# Altium PCB TIDA-010967_PCB.PcbDoc (part 2 of 5)
Units mil, origin at the board's own origin, x right, y up, seen from the top; angles counter-clockwise.
Board outline 2322.7 x 960 mil, 2 copper layers (Top Layer, Bottom Layer), stack 44.731 mil thick; 178 components, 80 nets, 496 pads, 399 vias.
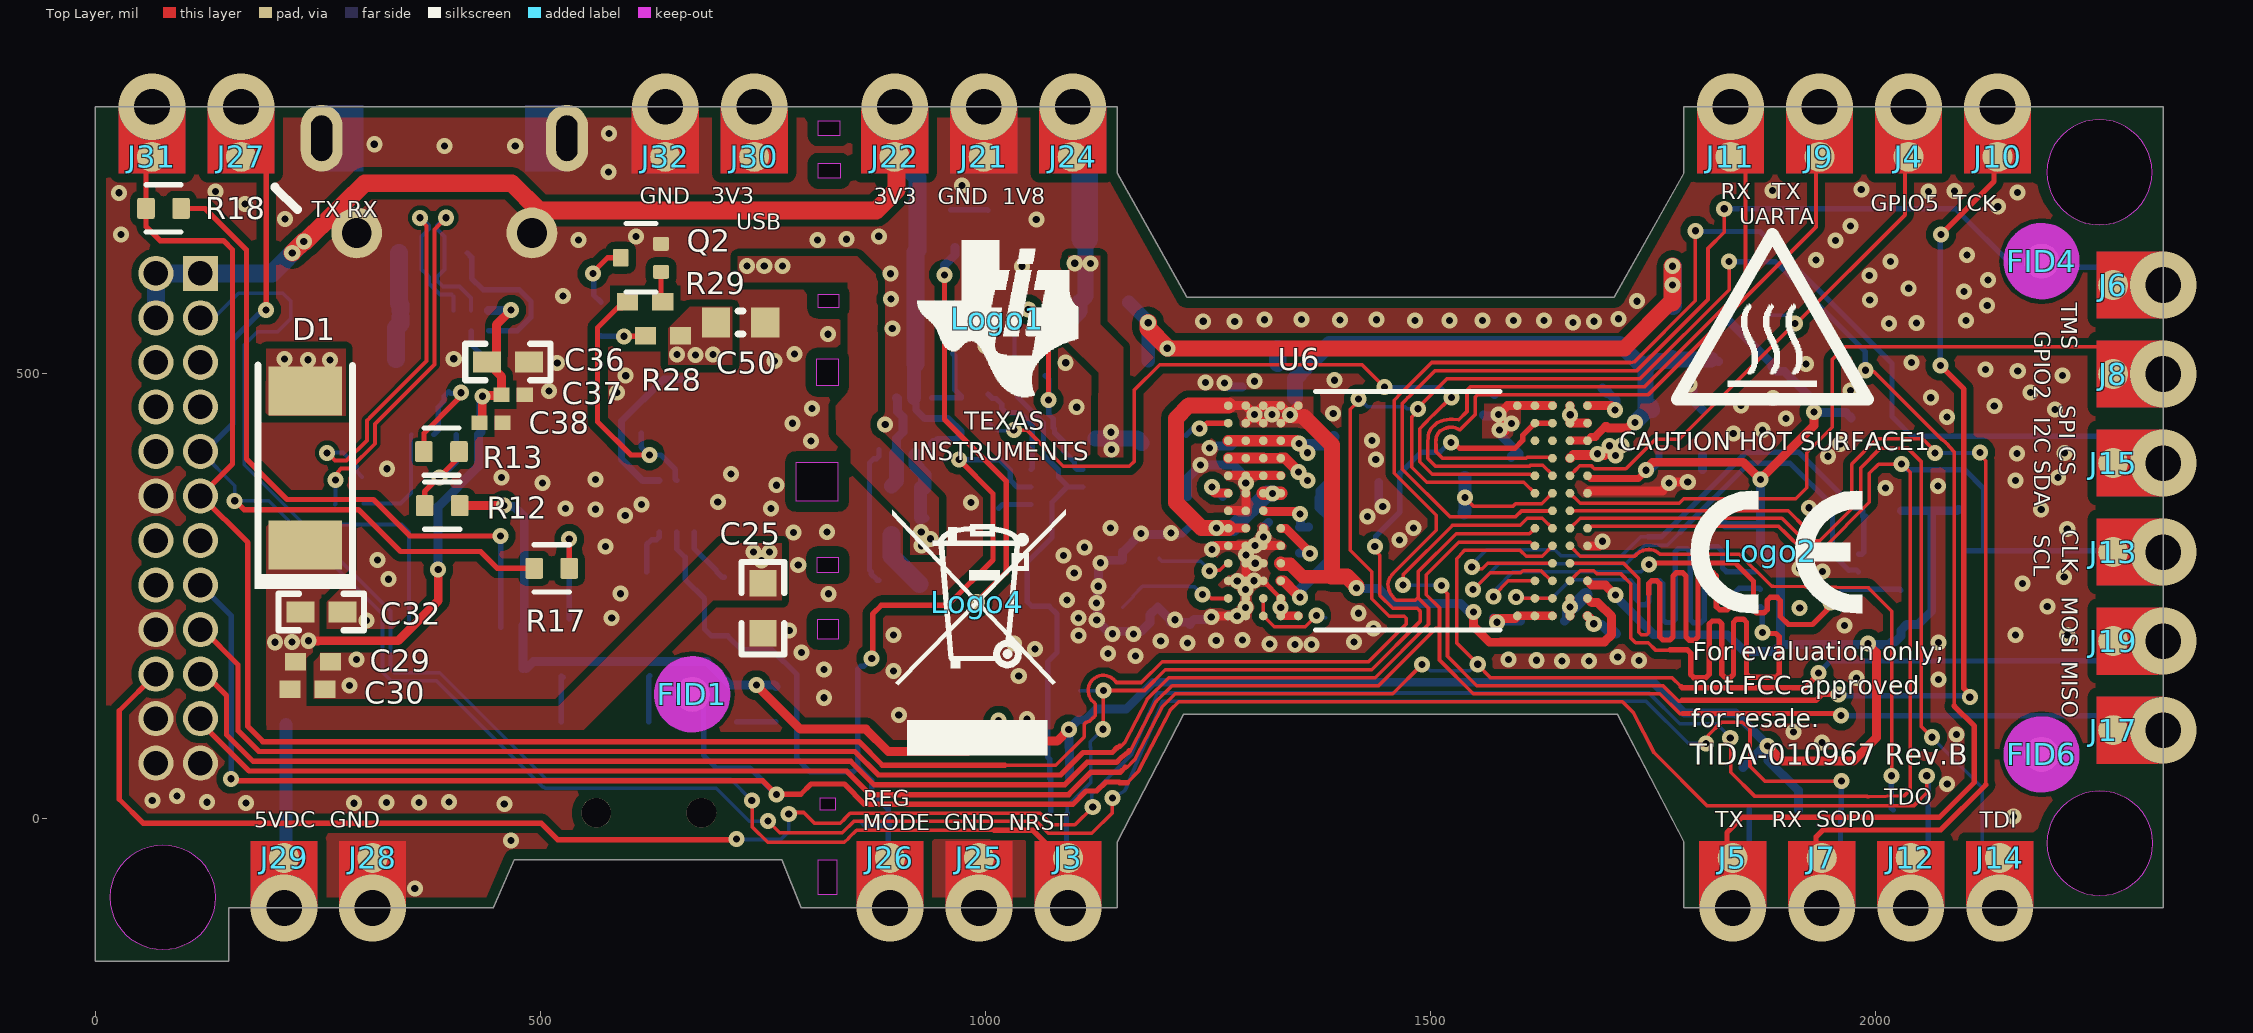
[diagram p0: Top Layer view]

## Part data (continued)
C33: library part CMP-0008944-2, "CAP, CERM, 47 uF, 10 V, +/- 10%, X5R, 1206", Cap_Case=1206, Manufacturer=MuRata, Supplier Part Number 1=81-GRM31CR61A476KE5L, TempCo=X5R, Tolerance_%=10%, Value1=Unknown, Value2=10V, ValueDisplayed=47uF, AEC Category=Q200, AEC Qualified=?, Cap_F=47¦ÌF, ComponentLink1Description="Datasheet link", ComponentLink1URL=http://search.murata.co.jp/Ceramy/PnsearchViewAction.do?HnOFG=ON&HnNFG=ON&SEL_CNT=50&sLang=en&sKey=GRM31CR61A476KE15L&x=9&y=9&search=startwith, CompType=Capacitor, LatestRevisionDate=2017-03-09, MountType=SMT, PackageReference=1206, PartNumber=GRM31CR61A476KE15L, Polarized=N, Published=2008-06-19, Publisher="Texas Instruments", RoHS=Y, SizeArea_mm2=5.12, SizeAreaWB_mm2=10.92, SizeX_mm=3.2, SizeY_mm=1.6, SizeZ_mm=1.8, Supplier 1=Mouser, TaMax_C=85¡ãC, TaMin_C=-55¡ãC, Technology=Ceramic, U/M=EA, VDC_V=10V
C34: library part CMP-0064969-1, "CAP, CERM, 0.1 uF, 10 V,+/- 10%, X7S, 0201", Cap_Case=0201, Manufacturer=MuRata, Supplier Part Number 1=490-14450-1-ND, TempCo=X7S, Tolerance_%=10%, Value1=Unknown, Value2=10V, ValueDisplayed=0.1uF, AEC Category=Q200, AEC Grade=N/A, AEC Qualified=N, Cap_F=100nF, ComponentLink1Description="Datasheet link", ComponentLink1URL=http://search.murata.co.jp/Ceramy/image/img/A01X/G101/ENG/GRM033C71A104KE14-01.pdf, CompType=Capacitor, LatestRevisionDate=2017-06-05, MountType=SMT, PackageReference=0201, PartNumber=GRM033C71A104KE14D, Polarized=N, Published=2008-06-19, Publisher="Texas Instruments", RoHS=Y, SizeArea_mm2=0.18, SizeAreaWB_mm2=2.08, SizeX_mm=0.6, SizeY_mm=0.3, SizeZ_mm=0.26, Supplier 1=Digi-Key, Supplier 2=Mouser, Supplier Part Number 2=81-GRM033C71A104KE4D, TaMax_C=125¡ãC, TaMin_C=-55¡ãC, Technology=Ceramic, U/M=EA, VDC_V=10V
C36: library part CMP-0078623-1, "CAP, CERM, 10 ¦ÌF, 10 V,+/- 20%, X5R, 0402", Cap_Case=0402_080, Manufacturer=AVX, Supplier Part Number 1=478-10052-1-ND, TempCo=X5R, Tolerance_%=20%, Value2=10V, ValueDisplayed=10¦ÌF, AEC Category=Q200, AEC Grade=N/A, AEC Qualified=N, Cap_F=10¦ÌF, ComponentLink1Description="Datasheet link", ComponentLink1URL=http://datasheets.avx.com/cx5r.pdf, CompType=Capacitor, MountType=SMT, PackageReference=0402, PartNumber=0402ZD106MAT2A, Polarized=N, RoHS=Y, SizeArea_mm2=0.5, SizeAreaWB_mm2=3, SizeX_mm=1, SizeY_mm=0.5, SizeZ_mm=0.8, Supplier 1=Digi-Key, Supplier 2=Mouser, Supplier Part Number 2=581-0402ZD106MAT2A, TaMax_C=85¡ãC, TaMin_C=-55¡ãC, Technology=Ceramic, U/M=EA, VDC_V=10V
C37 C39 C40: library part CMP-0009717-2, "CAP, CERM, 0.1 uF, 16 V, +/- 10%, X5R, 0201", Cap_Case=0201, Manufacturer=MuRata, Supplier Part Number 1=490-9985-1-ND, TempCo=X5R, Tolerance_%=10%, Value1=Unknown, Value2=16V, ValueDisplayed=0.1uF, AEC Category=Q200, AEC Grade=N/A, AEC Qualified=N, Cap_F=100nF, ComponentLink1Description="Datasheet link", ComponentLink1URL=http://psearch.en.murata.com/capacitor/product/GRM033R61C104KE84%23.pdf, CompType=Capacitor, LatestRevisionDate=2017-03-09, MountType=SMT, PackageReference=0201, PartNumber=GRM033R61C104KE84D, Polarized=N, Published=2008-06-19, Publisher="Texas Instruments", RoHS=Y, SizeArea_mm2=0.18, SizeAreaWB_mm2=2.08, SizeX_mm=0.6, SizeY_mm=0.3, SizeZ_mm=0.33, Supplier 1=Digi-Key, Supplier 2=Mouser, Supplier Part Number 2=81-GRM33R61C104KE84D, TaMax_C=85¡ãC, TaMin_C=-55¡ãC, Technology=Ceramic, U/M=EA, VDC_V=16V
C38: library part CMP-0009720-2, "CAP, CERM, 0.01 uF, 6.3 V, +/- 10%, X7R, 0201", Cap_Case=0201, Manufacturer=MuRata, Supplier Part Number 1=490-1262-1-ND, TempCo=X7R, Tolerance_%=10%, Value1=Unknown, Value2=6.3V, ValueDisplayed=0.01uF, AEC Category=Q200, AEC Qualified=?, Cap_F=10nF, ComponentLink1Description="Datasheet link", ComponentLink1URL=http://search.murata.co.jp/Ceramy/PnsearchViewAction.do?HnOFG=ON&HnNFG=ON&SEL_CNT=50&sLang=en&sKey=GRM033R70J103KA01D&x=9&y=9&search=startwith, CompType=Capacitor, LatestRevisionDate=2017-03-09, MountType=SMT, PackageReference=0201, PartNumber=GRM033R70J103KA01D, Polarized=N, Published=2008-06-19, Publisher="Texas Instruments", RoHS=Y, SizeArea_mm2=0.18, SizeAreaWB_mm2=2.08, SizeX_mm=0.6, SizeY_mm=0.3, SizeZ_mm=0.26, Supplier 1=Digi-Key, Supplier 2=Mouser, Supplier Part Number 2=81-GRM033R70J103KA1D, TaMax_C=125¡ãC, TaMin_C=-55¡ãC, Technology=Ceramic, U/M=EA, VDC_V=6.3V
C41 C42: library part CMP-0124498-1, "Ceramic Capacitor for Automotive 22pF  ¡À5% 25VDC C0G 0201 Paper T/R", Manufacturer=Murata, Operating Temperature Range="-55¡ãC to +125¡ãC", TempCo=30ppm/¡ãC, Temperature Characteristic=C0G, Tolerance_%=0.05%, ValueDisplayed=22pF, AEC Grade="Grade 1", AEC Qualified=Yes, Cap_F=22pF, ComponentLink1Description=Datasheet, ComponentLink1URL=https://www.murata.com/en-us/products/productdetail?partno=GCM0335C1E220JA16%23, datasheet=https://www.murata.com/en-us/products/productdetail?partno=GCM0335C1E220JA16%23, Datasheet Path=datasheets/Cap-GCM0335C1E220JA16D.pdf, helpURL=https://upverter.com/upn/revision/7c4daa696f5ee5c6/, Lead Free=Yes, PackageReference=0201, Part Number=GCM0335C1E220JA16D, PartNumber=GCM0335C1E220JA16D, RoHS=TRUE, SizeZ_mm=0.33mm, VDC_V=25V
C43: library part CMP-0064946-2, "CAP, CERM, 0.1 uF, 50 V,+/- 10%, X7R, 0402", Cap_Case=0402, Manufacturer=TDK, Supplier Part Number 1=445-173610-1-ND, TempCo=X7R, Tolerance_%=10%, Value1=Unknown, Value2=50V, ValueDisplayed=0.1uF, AEC Category=Q200, AEC Grade=N/A, AEC Qualified=N, Cap_F=100nF, ComponentLink1Description="Datasheet link", ComponentLink1URL=https://product.tdk.com/info/en/catalog/datasheets/mlcc_commercial_soft_en.pdf, CompType=Capacitor, LatestRevisionDate=2017-06-05, MountType=SMT, PackageReference=0402, PartNumber=C1005X7R1H104K050BE, Polarized=N, Published=2008-06-19, Publisher="Texas Instruments", RoHS=Y, SizeArea_mm2=0.5, SizeAreaWB_mm2=3, SizeX_mm=1, SizeY_mm=0.5, SizeZ_mm=0.6, Supplier 1=Digi-Key, Supplier 2=Newark, Supplier 3=Mouser, Supplier Part Number 2=92Y5763, Supplier Part Number 3=810-C1005X7R1H104KBE, TaMax_C=125¡ãC, TaMin_C=-55¡ãC, Technology=Ceramic, U/M=EA, VDC_V=50V
C45 C69 C74: library part CMP-0006470-2, "CAP, CERM, 470 pF, 50 V, +/- 5%, C0G/NP0, 0402", Cap_Case=0402, Manufacturer=MuRata, Supplier Part Number 1=490-1297-1-ND, TempCo=C0G/NP0, Tolerance_%=5%, Value1=Unknown, Value2=50V, ValueDisplayed=470pF, AEC Category=Q200, AEC Qualified=?, Cap_F=470pF, ComponentLink1Description="Datasheet link", ComponentLink1URL=http://search.murata.co.jp/Ceramy/PnsearchViewAction.do?HnOFG=ON&HnNFG=ON&SEL_CNT=50&sLang=en&sKey=GRM1555C1H471JA01D&x=9&y=9&search=startwith, CompType=Capacitor, LatestRevisionDate=2017-03-09, MountType=SMT, PackageReference=0402, PartNumber=GRM1555C1H471JA01D, Polarized=N, Published=2008-06-19, Publisher="Texas Instruments", RoHS=Y, SizeArea_mm2=0.5, SizeAreaWB_mm2=3, SizeX_mm=1, SizeY_mm=0.5, SizeZ_mm=0.6, Supplier 1=Digi-Key, Supplier 2=Mouser, Supplier 3=Farnell, Supplier Part Number 2=81-GRM1555C1H471JA01, Supplier Part Number 3=8819688, TaMax_C=125¡ãC, TaMin_C=-55¡ãC, Technology=Ceramic, U/M=EA, VDC_V=50V
C46 C47: library part CMP-0006367-2, "CAP, CERM, 4.7 pF, 50 V, +/- 2%, C0G/NP0, 0402", Cap_Case=0402, Manufacturer=MuRata, Supplier Part Number 1=490-8102-1-ND, TempCo=C0G/NP0, Tolerance_%=2%, Value1=Unknown, Value2=50V, ValueDisplayed=4.7pF, AEC Category=Q200, AEC Grade=N/A, AEC Qualified=N, Cap_F=4.7pF, ComponentLink1Description="Datasheet link", ComponentLink1URL=http://psearch.murata.com/capacitor/product/GJM1555C1H4R7BB01%23.pdf, CompType=Capacitor, LatestRevisionDate=2017-03-09, MountType=SMT, PackageReference=0402, PartNumber=GJM1555C1H4R7BB01D, Polarized=N, Published=2008-06-19, Publisher="Texas Instruments", RoHS=Y, SizeArea_mm2=0.5, SizeAreaWB_mm2=3, SizeX_mm=1, SizeY_mm=0.5, SizeZ_mm=0.6, Supplier 1=Digi-Key, Supplier 2=Mouser, Supplier Part Number 2=81-GJM1555C1H4R7BB01, TaMax_C=125¡ãC, TaMin_C=-55¡ãC, Technology=Ceramic, U/M=EA, VDC_V=50V
C48: library part CMP-0860563-1, "CAP, CERM, 0.22 ¦ÌF, 16 V,+/- 10%, X7R, 0402", Cap_Case=0402, Manufacturer="Samsung Electro-Mechanics", TempCo=X7R, Tolerance_%=10%, Value2=16V, ValueDisplayed=0.22¦ÌF, AEC Category=Q200, AEC Grade=N/A, AEC Qualified=N, Cap_F=220nF, ComponentLink1Description="Datasheet link", ComponentLink1URL=http://www.samsungsem.com/kr/support/product-search/mlcc/__icsFiles/afieldfile/2019/06/18/CL05B224KO5NNNC-19.pdf, CompType=Capacitor, Green_EU RoHS=Passed, Green_EU RoHS-2=Passed, Green_Lifecycle=Active, Green_REACh=Incomplete, MountType=SMT, PackageReference=0402, PartNumber=CL05B224KO5NNNC, Polarized=N, RoHS=Y, SizeArea_mm2=0.5, SizeAreaWB_mm2=3, SizeX_mm=1, SizeY_mm=0.5, SizeZ_mm=0.6, TaMax_C=125¡ãC, TaMin_C=-55¡ãC, Technology=Ceramic, U/M=EA, VDC_V=16V
"CAUTION HOT SURFACE1": library part CMP-0074837-2, "IEC 61010-1 Hot Surface Warning", Manufacturer="Texas Instruments", AEC Category=Q200, ComponentLink1Description="Datasheet Link", ComponentLink1URL=http://www.ti.com/lit/ds/symlink/GPN.pdf, ComponentLink2Description="Product Folder", ComponentLink2URL=http://www.ti.com/product/GPN, ComponentLink3Description="Online Datasheet", ComponentLink3URL=http://www.ti.com/product/GPN/datasheet, CompType=IC, LatestRevisionDate=2017-07-06, Lib Reference=IEC_HotSurface, PartNumber="CAUTION HOT SURFACE", Published=2009-03-03, Publisher="Texas Instruments", SymbolCreator=a0412235, SymbolVersion=2011-08-22
D1: library part CMP-0078758-2, "Diode, Schottky, 30 V, 2 A, AEC-Q101, SOD-128", Manufacturer=Nexperia, Value1=2A, Value2=0.36V, AEC Category=Q101, AEC Qualified=Y, ComponentLink1Description="Datasheet link", ComponentLink1URL=https://assets.nexperia.com/documents/data-sheet/PMEG3020EP.pdf, CompType=Diode, Io_A=2A, MountType=SMT, PackageReference=SOD-128, PartNumber=PMEG3020EP,115, RoHS=Y, SizeArea_mm2=11.5, SizeAreaWB_mm2=19.6, SizeX_mm=4.6, SizeY_mm=2.5, SizeZ_mm=1.1, TJmax_C=150¡ãC, TYPE=Schottky, Vf_V=3.6dV, Vr_V=30V
D2 D3: library part CMP-0090807-1, "LED Uni-Color Yellow 588nm 2-Pin Chip 0402(1006Metric) T/R", Color=Yellow, Digikey Part Number=VLMY1500-GS08CT-ND, Forward Current=20mA, Manufacturer=Vishay, Mouser Part Number=78-VLMY1500-GS08, Operating Temperature Range="-30¡ãC to +85 ¡ãC", Power_TotalModule=75mW, AEC Qualified=No, Angle=130¡ã, ComponentLink1Description=Datasheet, ComponentLink1URL=https://www.vishay.com/docs/82554/vlmo1500.pdf, datasheet=https://www.vishay.com/docs/82554/vlmo1500.pdf, Datasheet Path=datasheets/Diode-VLMY1500-GS08.pdf, Digikey Description="LED YELLOW 0402 SMD", helpURL=https://upverter.com/upn/revision/6fc1d97824805f25/, LambdaD=590nm, LambdaP=588nm, Lead Free=Yes, Led Orientation="Top View", Luminous Intensity=90mcd, Mounting Type="Surface Mount", Mouser Description="VLMY1500-GS08 Yellow LED, 597 nm 1005 (0402), Square Lens SMD package", PackageReference=0402, Part Number=VLMY1500-GS08, PartNumber=VLMY1500-GS08, RoHS=TRUE, SizeZ_mm=0.35mm, TaMax_C=+85¡ãC, TaMin_C=-30¡ãC, Vf_V=2V, Vr_V=5V
FID1 FID2 FID3 FID4 FID5 FID6: library part CMP-0077181-1, "Fiducial mark.  There is nothing to buy or mount.", Manufacturer=N/A, ClassName=FiducialMark, CompType=Fiducial, MountType=N/A, PackageReference=N/A, PartNumber=N/A
J1: library part CMP-0054595-1, "Header, 1.27mm, 12x2, Gold, TH", Current_A=1A, Manufacturer="Sullins Connector Solutions", Supplier Part Number 1=S9015E-12-ND, Cert_UL=Y, ClassName=Header, CNHeader=TRUE, ComponentLink1Description="Datasheet URL", ComponentLink1URL=http://www.sullinscorp.com/catalogs/82_PAGE90-91_.050_MALE_HDR_ST_RA_SMT.pdf, CompType=Header, ContactFinish=Gold, CT=FALSE, Gender=Male, LatestRevisionDate=26/05/2017, MountType=TH, Orientation=Vertical, PackageReference="Header, 1.27mm, 12x2, TH", PartNumber=GRPB122VWVN-RC, PinCount=12, Pitch_mm=1.27, Publisher="Texas Instruments", RoHS=Y, Row_Count=2, RowSpacing_mm=1.27, Supplier 1=Digi-Key
J2: library part CMP-0055293-1, "Connector, Receptacle, Micro-USB Type B, R/A, Bottom Mount SMT", Manufacturer=Molex, Supplier Part Number 1=WM1399CT-ND, CNHeader=FALSE, ComponentLink1Description="Datasheet URL", ComponentLink1URL=http://www.molex.com/pdm_docs/sd/1050170001_sd.pdf, CompType=USB, CT=TRUE, Gender=Female, Green_EU RoHS=Passed, Green_EU RoHS-2=Passed, Green_Lifecycle=Active, Green_REACh=Passed, LatestRevisionDate=26/05/2017, MountType=SMT, PackageReference="Micro USB receptacle", PartNumber=105017-0001, Publisher="Texas Instruments", RoHS=Y, Supplier 1=Digi-Key, Supplier 2=Newark, Supplier 3=Mouser, Supplier Part Number 2=78R1699, Supplier Part Number 3=538-105017-0001
J3 J4 J5 J6 J7 J8 J9 J10 J11 J12 J13 J14 J15 J17 J19 J21 J22 J24 J25 J26 J27 J28 J29 J30 J31 J32: library part CMP-0124126-3, Manufacturer=Altium, Operating Temperature Range=to, Conn Gender=NA, Datasheet Path="datasheets/Conn-Castellation 2.54mm.pdf", helpURL=https://upverter.com/upn/revision/e505193ec818b83a/, PackageReference=CASTELLED_TERM, Part Number="Castellation 2.54mm", PartNumber="Castellation 2.54mm", PinCount=1, RoHS=UNKNOWN
L1: library part CMP-0078934-1, "Inductor, Ferrite Bead, Ferrite, 2.2 A, 0.035 ohm, AEC-Q200 Grade 1, SMD", Manufacturer=MuRata, Supplier Part Number 1=490-16506-1-ND, Value1="0.035 ohm", Value2=2.2A, AEC Category=Q200, AEC Grade=1, AEC Qualified=Y, ComponentLink1Description="Datasheet link", ComponentLink1URL=https://www.murata.com/en-us/products/productdata/8796748677150/QNFA9118.pdf, CompType=Inductor, DCR_ohm=0.035, Imax_A=2.2A, LatestRevisionDate=2017-12-07, Material=Ferrite, MountType=SMT, PackageReference=0402, PartNumber=BLM15PD300SZ1D, Published=2008-06-26, Publisher="Texas Instruments", RoHS=Y, SizeArea_mm2=0.5, SizeAreaWB_mm2=3, SizeX_mm=1, SizeY_mm=0.5, SizeZ_mm=0.6, Supplier 1=Digi-Key, Supplier 2=Mouser, Supplier Part Number 2=81-BLM15PD300SZ1D, Technology="Ferrite Bead"
L2 L15: library part CMP-0092096-1, "470nH Shielded Wirewound Inductor 3A 42mOhm Max 0805 (2012 Metric)", Digikey Part Number=490-17727-1-ND, Manufacturer=Murata, Mouser Part Number=81-DFE201210U-R47MP2, Operating Temperature Range="-40¡ãC to +125¡ãC", Part Number=DFE201210U-R47M=P2, Test Frequency=1MHz, Tolerance_%=20%, AEC Qualified=No, ComponentLink1Description=Datasheet, ComponentLink1URL=https://www.murata.com/en-us/products/productdetail?partno=DFE201210U-R47M%23, datasheet=https://www.murata.com/en-us/products/productdetail?partno=DFE201210U-R47M%23, Datasheet Path=datasheets/Ind-DFE201210U-R47M=P2.pdf, DCR_ohm=42m, Digikey Description="FIXED IND .47UH 3.0A 42MOHM", helpURL=https://upverter.com/upn/revision/7b65c208f048e6ea/, Ind_H=470nH, Irms=3A, Isat=4.4A, Lead Free=Yes, Material="Metal Alloy", PackageReference="0805 (2012)", PartNumber=DFE201210U-R47M=P2, RoHS=TRUE, Shrouded=true, SizeZ_mm=1mm, Supplier 1=Digikey, Supplier 2=Mouser, Supplier Part Number 1=490-17727-1-ND, Supplier Part Number 2=81-DFE201210U-R47MP2, Technology=Wirewound
L3 L6: library part CMP-0124620-1, "100 nH Shielded Drum Core, Wirewound Inductor 3.65 A 22mOhm Max 0806 (2016 Metric)", Digikey Part Number=3442-SPH201610UR10MTTR-ND, Manufacturer=Sunlord, Operating Temperature Range="-40¡ãC to +125¡ãC", Self Resonant Frequency=583MHz, Test Frequency=1MHz, Tolerance_%=20%, AEC Qualified=No, ComponentLink1Description=Datasheet, ComponentLink1URL=https://www.sunlordinc.com/uploads/files/20240806/en/SPH%C2%A0Series%C2%A0of%C2%A0SMD%C2%A0Power%C2%A0Inductor.pdf, datasheet=https://www.sunlordinc.com/uploads/files/20240806/en/SPH%C2%A0Series%C2%A0of%C2%A0SMD%C2%A0Power%C2%A0Inductor.pdf, Datasheet Date=2024-06-19, Datasheet Path=datasheets/Ind-SPH201610UR10MT.pdf, DCR_ohm=22m, Digikey Description="FIXED IND 100NH 3.65A 22MOHM SMD", helpURL=https://upverter.com/upn/revision/4015f0fc3580b88b/, Ind_H=100nH, Irms=4.25A, Isat=4.8A, Lead Free=Yes, Material=Ferrite, PackageReference=SMT_IND_2MM0_1MM6, Part Number=SPH201610UR10MT, PartNumber=SPH201610UR10MT, RoHS=TRUE, Shrouded=true, SizeZ_mm=1mm, Supplier 1=Digikey, Supplier Part Number 1=3442-SPH201610UR10MTTR-ND, Technology=Wirewound
L4 L7: library part CMP-0077879-2, "Ferrite Bead, 120 ohm @ 100 MHz, 1.9 A, 0603", Manufacturer=MuRata, Supplier Part Number 1=490-13261-1-ND, Value1="0.04 ohm", Value2=1.9A, ValueDisplayed="120 ohm", ComponentLink1Description="Datasheet link", ComponentLink1URL=http://www.murata.com/en-global/products/productdata/8796737273886/QNFA9101.pdf, CompType="Ferrite Bead", DCR_ohm=0.04, Imax_A=1.9A, MountType=SMT, PackageReference=0603, PartNumber=BLM18KG121TH1D, RoHS=Y, SizeArea_mm2=1.28, SizeAreaWB_mm2=4.68, SizeX_mm=1.6, SizeY_mm=0.8, SizeZ_mm=1.0, Supplier 1=Digi-Key, Supplier 2=Mouser, Supplier Part Number 2=81-BLM18KG121TH1D, ZTyp@100MHz_Ohm=120
Logo1: library part CMP-0074838-1, "Texas Instrument Corporate Signature", ClassName=Logo, LatestRevisionDate=2017-07-06, Lib Reference=TI_Logo, PartNumber="Texas Instruments", Published=2009-03-03, Publisher="Texas Instruments", SymbolCreator=a0412235, SymbolVersion=2011-08-22
Logo2: library part CMP-0074844-2, Manufacturer="Texas Instruments", AEC Category=Q200, ComponentLink1Description="Datasheet Link", ComponentLink1URL=http://www.ti.com/lit/ds/symlink/GPN.pdf, ComponentLink2Description="Product Folder", ComponentLink2URL=http://www.ti.com/product/GPN, ComponentLink3Description="Online Datasheet", ComponentLink3URL=http://www.ti.com/product/GPN/datasheet, CompType=IC, LatestRevisionDate=2017-07-06, Lib Reference="CE Mark", PartNumber="CE Mark", Published=2009-03-03, Publisher="Texas Instruments", SymbolCreator=a0412235
Logo4: library part CMP-0074769-1, Lib Reference="WEEE logo", PartNumber="WEEE logo"
Q1 Q2: library part CMP-0091833-1, "N-Channel 20V 250mA (Ta) 500mW (Ta) Surface Mount VESM", Digikey Part Number=SSM3K35AMFVL3FCT-ND, Drain To Source Breakdown Voltage=20V, Input Capacitace At Vds="18pF @ 10V", Manufacturer=Toshiba, Mouser Part Number=757-SSM3K35AMFVL3F, Operating Temperature Range="to +150¡ãC", Power_W=150mW, Pulse Drain Current=600mA, Typ Forward Diode Voltage=0.8V, AEC Qualified=No, ChMode=False, ComponentLink1Description=Datasheet, ComponentLink1URL=https://toshiba.semicon-storage.com/info/docget.jsp?did=55390&prodName=SSM3K35AMFV, datasheet=https://toshiba.semicon-storage.com/info/docget.jsp?did=55390&prodName=SSM3K35AMFV, Datasheet Path=datasheets/Trans-SSM3K35AMFV,L3F.pdf, Digikey Description="MOSFET N-CH 20V 250MA VESM", helpURL=https://upverter.com/upn/revision/e3a5b9c3bcd77515/, IdsMax_A=250mA, Lead Free=Yes, Number of Channels=1, Number Of N Channels=1, PackageReference=SOT-723, Part Number=SSM3K35AMFV,L3F, PartNumber=SSM3K35AMFV,L3F, QgTyp_nC="0.34nC @ 4.5V", Rdson45_ohm=0.75, RoHS=TRUE, SizeZ_mm=0.55mm, Threshold Vgs Max=1V, Threshold Vgs Min=0.35V, TJmax_C=+150¡ãC, Turn Off Delay Time=6.5ns, Turn On Delay Time=2ns, VdsMax_V=1.2V, Vgs_V=10V
R1 R3 R5 R7 R12 R13 R17 R18: library part CMP-0093147-1, "Res Jumper Thick Film 0402 0 Ohm 5% 1/16W Molded SMD Paper T/R", Digikey Part Number=YAG1279CT-ND, Manufacturer=Yageo, Mouser Part Number=603-RC0402JR-070RP, Operating Temperature Range="-55¡ãC to +155¡ãC", Power_W=63mW, AEC Qualified=No, ComponentLink1Description=Datasheet, ComponentLink1URL=https://www.yageo.com/upload/media/product/productsearch/datasheet/rchip/PYu-RC_51_RoHS_P_2.pdf, datasheet=https://www.yageo.com/upload/media/product/productsearch/datasheet/rchip/PYu-RC_51_RoHS_P_2.pdf, Datasheet Path=datasheets/Res-RC0402JR-070RP.pdf, Digikey Description="RES SMD 0 OHM JUMPER 1/16W 0402", helpURL=https://upverter.com/upn/revision/1e1ee5977c47aafb/, Lead Free=Yes, Mouser Description="RC Series 0402 Jumper Thick Film Chip Resistor", PackageReference=0402, Part Number=RC0402JR-070RP, PartNumber=RC0402JR-070RP, Res_ohm=0, RoHS=TRUE, Series=RC_P, SizeZ_mm=0.4mm, Supplier 1=Digikey, Supplier 2=Mouser, Supplier Part Number 1=YAG1279CT-ND, Supplier Part Number 2=603-RC0402JR-070RP, Technology="Thick Film", VDC_V=50V
R2: library part CMP-0026367-2, "RES, 40.2 k, 1%, 0.063 W, AEC-Q200 Grade 0, 0402", Manufacturer=Vishay-Dale, Power_W=63mW, Supplier Part Number 1=541-40.2KLCT-ND, TempCo="100 ppm/C", Tolerance_%=1%, Value2=0.063W, Value_Code=40k2, ValueDisplayed=40.2k, AEC Category=Q200, AEC Grade=0, AEC Qualified=Y, ComponentLink1Description="Datasheet link", ComponentLink1URL=http://www.vishay.com/docs/20035/dcrcwe3.pdf, CompType=Resistor, EIA_Code=E96, MountType=SMT, PackageReference=0402, PartNumber=CRCW040240K2FKED, Res_ohm=40.2k, RoHS=E, SizeArea_mm2=0.5, SizeX_mm=1, SizeY_mm=0.5, SizeZ_mm=0.6, Supplier 1=Digi-Key, Supplier 2=Newark, Supplier 3=Mouser, Supplier Part Number 2=52K7049, Supplier Part Number 3=71-CRCW0402-40.2K-E3, Technology="Thick Film", Value1=1%, VDC_V=50V
R4 R24 R25 R44 R49 R73 R74 R75: library part CMP-0026245-2, "RES, 2.00 M, 1%, 0.063 W, AEC-Q200 Grade 0, 0402", Manufacturer=Vishay-Dale, Power_W=63mW, Supplier Part Number 1=541-2.00MLCT-ND, TempCo="100 ppm/C", Tolerance_%=1%, Value2=0.063W, Value_Code=2M00, ValueDisplayed=2.00M, AEC Category=Q200, AEC Grade=0, AEC Qualified=Y, ComponentLink1Description="Datasheet link", ComponentLink1URL=http://www.vishay.com/docs/20035/dcrcwe3.pdf, CompType=Resistor, EIA_Code=E96, MountType=SMT, PackageReference=0402, PartNumber=CRCW04022M00FKED, Res_ohm=2M, RoHS=E, SizeArea_mm2=0.5, SizeX_mm=1, SizeY_mm=0.5, SizeZ_mm=0.6, Supplier 1=Digi-Key, Supplier 2=Newark, Supplier 3=Mouser, Supplier Part Number 2=52K6816, Supplier Part Number 3=71-CRCW0402-2M-E3, Technology="Thick Film", Value1=1%, VDC_V=50V
R6 R11: library part CMP-0089143-1, "0 Ohms Jumper 0.1W, 1/10W Chip Resistor 0603 (1608 Metric) Automotive AEC-Q200 Thick Film", Digikey Part Number=P0.0GCT-ND, Manufacturer=Panasonic, Mouser Part Number=667-ERJ-3GEY0R00V, Operating Temperature Range="-55¡ãC to +155¡ãC", Power_W=100mW, TempCo=-100/+600ppm/¡ãC, Tolerance_%=5%, AEC Grade="Grade 0", AEC Qualified=Yes, ComponentLink1Description=Datasheet, ComponentLink1URL=https://industrial.panasonic.com/cdbs/www-data/pdf/RDA0000/AOA0000C301.pdf, datasheet=https://industrial.panasonic.com/cdbs/www-data/pdf/RDA0000/AOA0000C301.pdf, Datasheet Path=datasheets/Res-ERJ-3GEY0R00V.pdf, Device Class L1="Passive Components", Device Class L2=Resistors, Device Class L3="Chip SMD Resistors", Digikey Description="RES SMD 0 OHM JUMPER 1/10W 0603", helpURL=https://upverter.com/upn/revision/655dc946655e5dbc/, Lead Free=Yes, Mouser Description="Resistor, Chip Thick Film, 0 Ohm, 0.1w, Resistor, Chip Thick Film, 0 Ohm, 0.1w, 5%", PackageReference=0603, Part Number=ERJ-3GEY0R00V, PartNumber=ERJ-3GEY0R00V, Res_ohm=0, RoHS=TRUE, Series=ERJ, SizeZ_mm=0.55mm, Supplier 1=Digikey, Supplier 2=Mouser, Supplier Part Number 1=P0.0GCT-ND, Supplier Part Number 2=667-ERJ-3GEY0R00V, Technology="Thick Film", VDC_V=75V
R8 R9 R16 R20: library part CMP-0025958-3, "RES, 10.0 k, 1%, 0.063 W, AEC-Q200 Grade 0, 0402", Manufacturer=Vishay-Dale, Power_W=63mW, Supplier Part Number 1=541-10.0KLCT-ND, TempCo="100 ppm/C", Tolerance_%=1%, Value2=0.063W, Value_Code=10k0, ValueDisplayed=10.0k, AEC Category=Q200, AEC Grade=0, AEC Qualified=Y, ComponentLink1Description="Datasheet link", ComponentLink1URL=http://www.vishay.com/docs/20035/dcrcwe3.pdf, CompType=Resistor, EIA_Code=E96, MountType=SMT, PackageReference=0402, PartNumber=CRCW040210K0FKED, Res_ohm=10k, RoHS=E, SizeArea_mm2=0.5, SizeX_mm=1, SizeY_mm=0.5, SizeZ_mm=0.6, Supplier 1=Digi-Key, Supplier 2=Newark, Supplier 3=Mouser, Supplier Part Number 2=52K6595, Supplier Part Number 3=71-CRCW0402-10K-E3, Technology="Thick Film", Value1=1%, VDC_V=50V
R10: library part CMP-0025950-3, "RES, 100 k, 1%, 0.063 W, AEC-Q200 Grade 0, 0402", Manufacturer=Vishay-Dale, Power_W=63mW, Supplier Part Number 1=541-100KLCT-ND, TempCo="100 ppm/C", Tolerance_%=1%, Value2=0.063W, Value_Code=100k, AEC Category=Q200, AEC Grade=0, AEC Qualified=Y, ComponentLink1Description="Datasheet link", ComponentLink1URL=http://www.vishay.com/docs/20035/dcrcwe3.pdf, CompType=Resistor, EIA_Code=E96, MountType=SMT, PackageReference=0402, PartNumber=CRCW0402100KFKED, Res_ohm=100k, RoHS=E, SizeArea_mm2=0.5, SizeX_mm=1, SizeY_mm=0.5, SizeZ_mm=0.6, Supplier 1=Digi-Key, Supplier 2=Newark, Supplier 3=Mouser, Supplier Part Number 2=52K6607, Supplier Part Number 3=71-CRCW0402-100K-E3, Technology="Thick Film", Value1=1%, ValueDisplayed=100k, VDC_V=50V